# Altium PCB final_version.PcbDoc
Units mil, origin at the board's own origin, x right, y up, seen from the top; angles counter-clockwise.
Board outline 3740 x 3175 mil, 2 copper layers (Top Layer, Bottom Layer); 78 components, 60 nets, 259 pads, 35 vias.
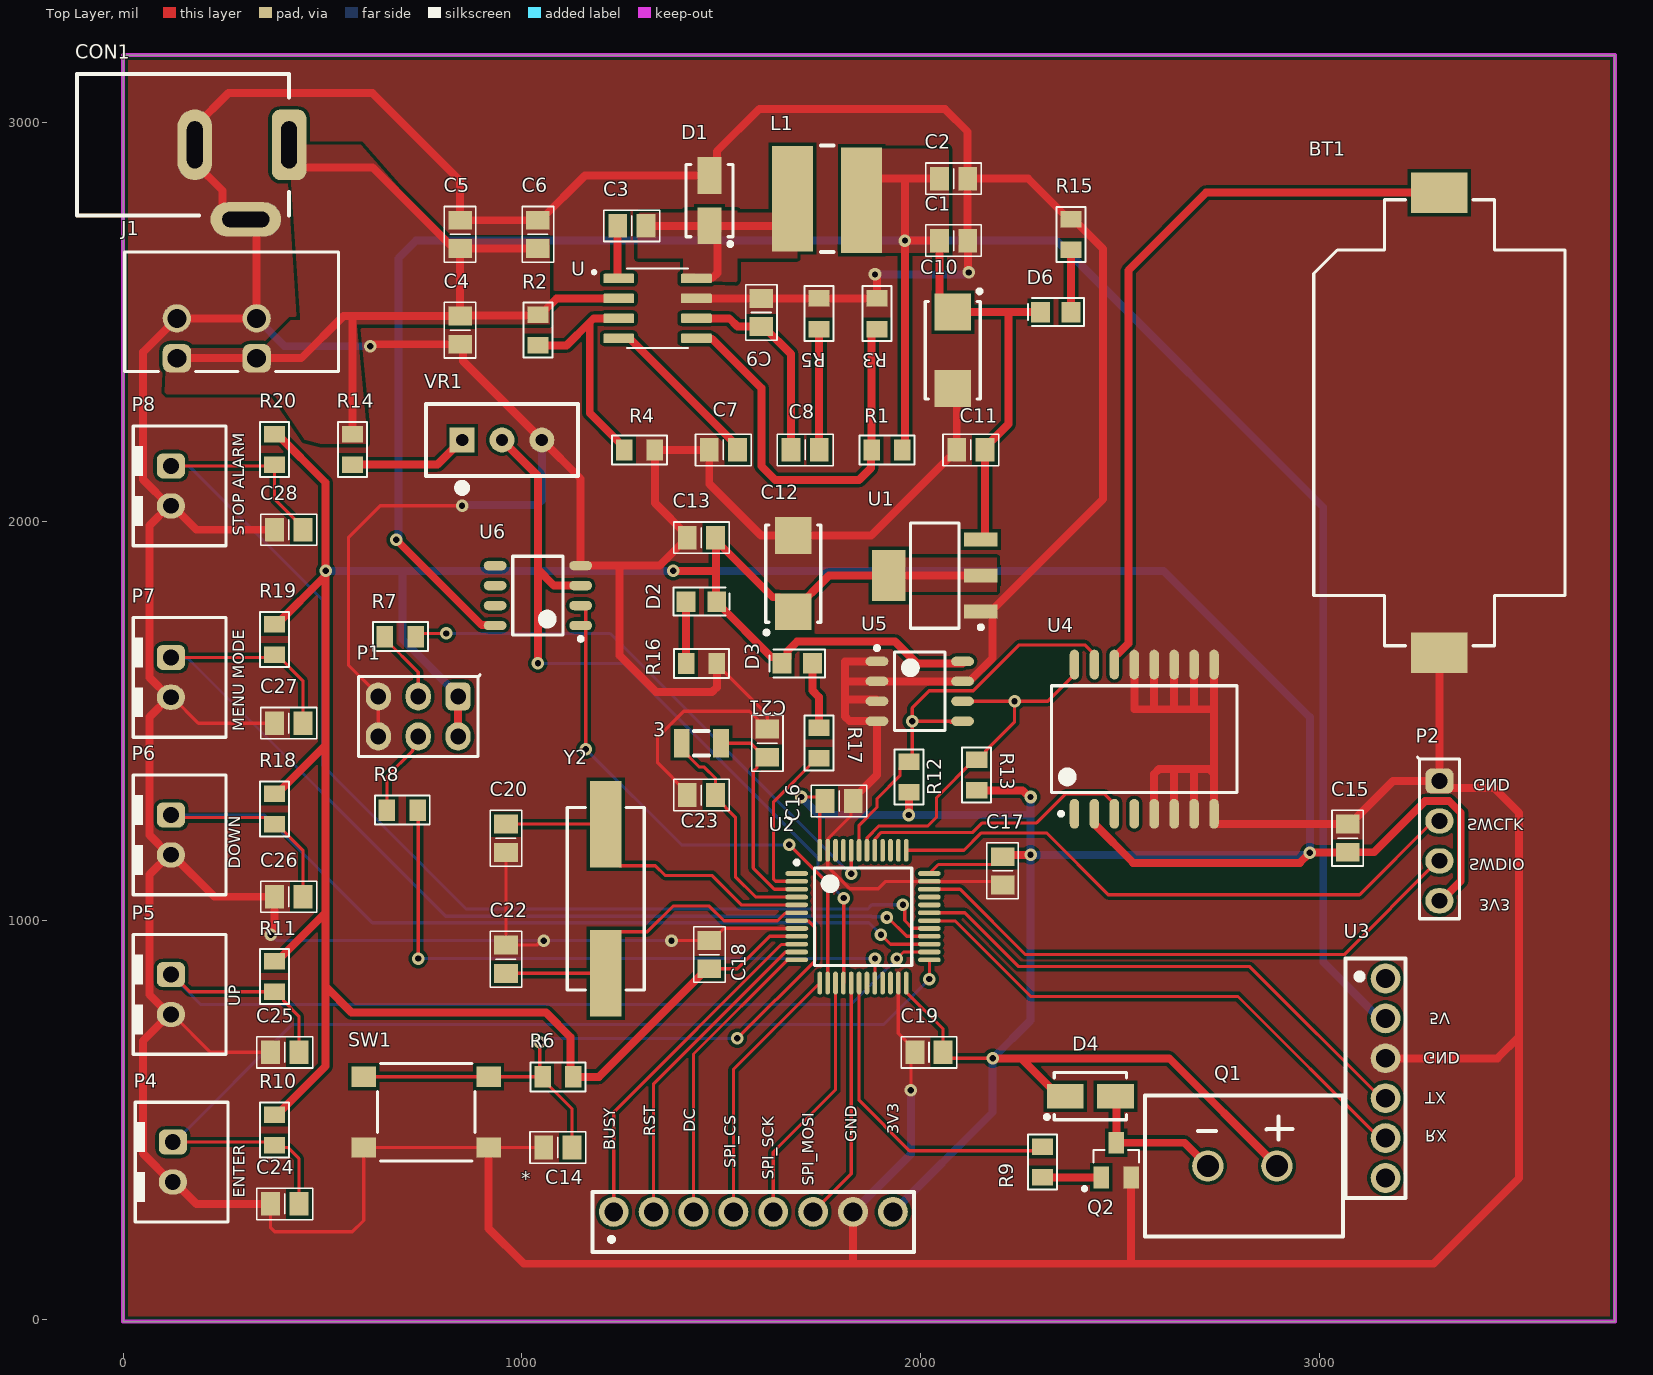
[diagram p0: Top Layer view]
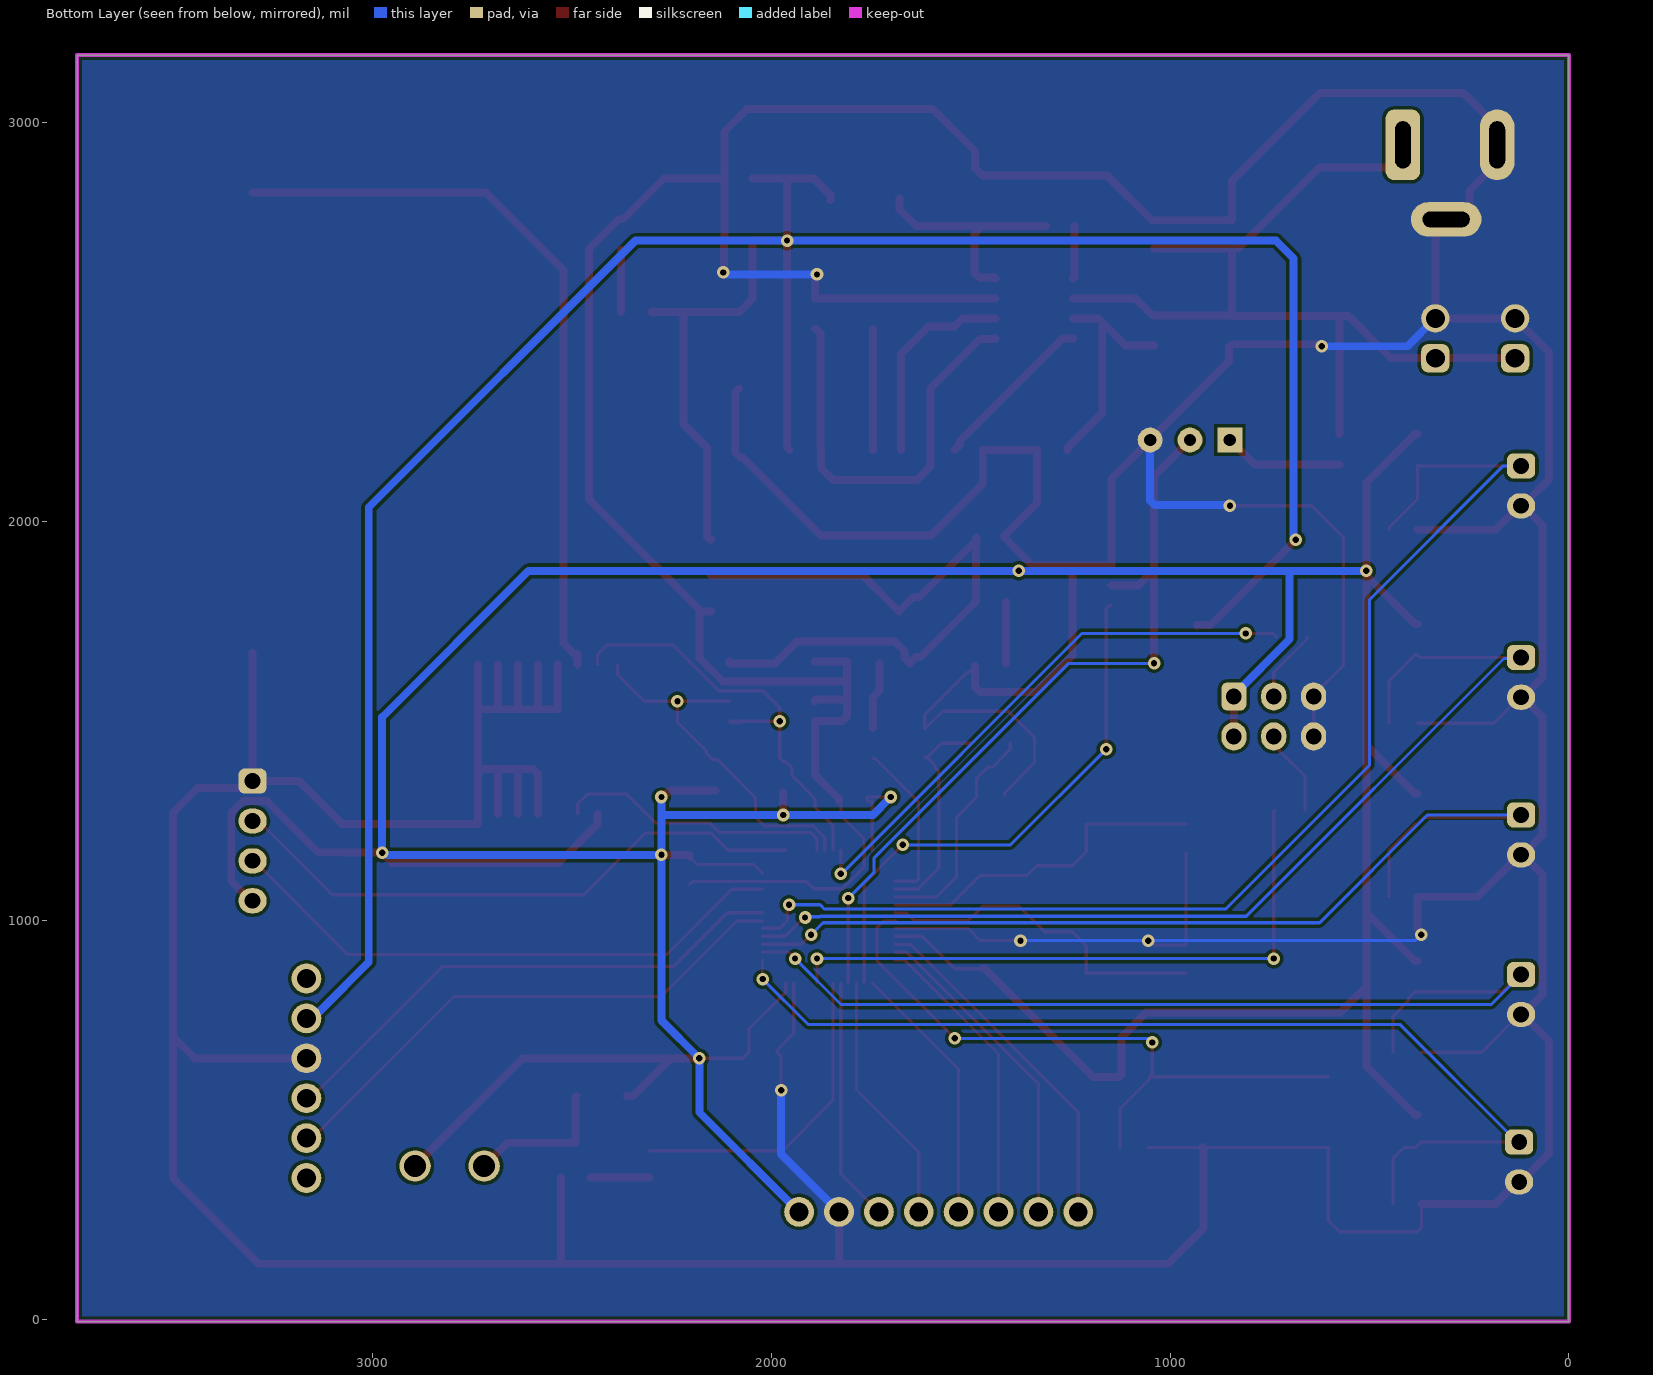
[diagram p1: Bottom Layer view, seen from below]

## Layer stack, top to bottom
Top Solder: solder mask 0.4, Solder Resist, Dk 3.5
Top Layer: signal copper 1.4
Dielectric 1: dielectric 12.6, FR-4, Dk 4.8
Bottom Layer: signal copper 1.4
Bottom Solder: solder mask 0.4, Solder Resist, Dk 3.5

## Board outline
0,-5 0,3170 3740,3170 3740,-5

## Design rules (kind name [scope] priority, off if disabled: settings)
Clearance [All] p1: gap=8 ignorepadtopadclearanceinfootprint=FALSE
PolygonConnect [All] p1: connectstyle=Direct reliefconductorwidth=10 reliefentries=4 polygonreliefangle="90 Angle" airgapwidth=10
RoutingVias [All] p1: holewidth=15.75 width=31.5 viastyle="Through Hole" minholewidth=15.75 minwidth=31.5 maxholewidth=15.75 maxwidth=31.5
SolderMaskExpansion [All] p1: expansion=4 istentingtop=FALSE
Width [All] p1: maxlimit=50 minlimit=8 preferedwidth=50
30 further rules are at their usual default settings.

## Classes and differential pairs
component class 08_ADC_measure: R14 U6 VR1
component class 07_E_ink_display_Button_control: * C24 C25 C26 C27 C28 D4 P4 P5 P6 P7 P8 Q1 Q2 R9 R10 R11 R18 R19 R20
component class 06_I2C_DS3231: BT1 R12 R13 U4 U5
component class 05_Uart_Bluetooth: U3
component class 04_MCU: 3 C14 C15 C16 C17 C18 C19 C20 C21 C22 C23 D2 D3 P1 P2 R6 R7 R8 R16 R17 SW1 U2 Y2
component class 03_Power_Spply: C1 C2 C3 C4 C5 C6 C7 C8 C9 C10 C11 C12 C13 CON1 D1 D6 J1 L1 R1 R2 R3 R4 R5 R15 U U1

## Components (designator, comment, footprint, x,y, rotation, side; value= is the part's Value field where it differs from the comment)
3 "32.768kHz" XKXGI-SUA-32.768K 1450,1445 r0 top
* "LCD_E_INK" LCD_E_INK_DISPLAY 1580,270 r0 top
BT1 "79527141" 79527141 3300,2248.23 r90 top
C1 "47uF" "C 0805" 2081.97,2705 r180 top
C2 "47uF" "C 0805" 2081.97,2860 r180 top
C3 "0.1uF" "C 0805" 1275.43,2742.01 r180 top
C4 "10uf" "C 0805" 845,2480.43 r90 top
C5 "10uf" "C 0805" 845,2720.43 r270 top
C6 "0.01uF" "C 0805" 1040,2720.43 r270 top
C7 "0.01uF" "C 0805" 1505,2180 r0 top
C8 "1000pF" "C 0805" 1710,2180 r180 top
C9 "47pF" "C 0805" 1600,2524.57 r270 top
C10 "22uF" "C SMD TAN 2312 (C)" 2080,2430 r270 top
C11 "100nF" "C 0805" 2125.43,2180 r0 top
C12 "22uF" "C SMD TAN 2312 (C)" 1680,1870 r90 top
C13 "100nF" "C 0805" 1450,1960 r0 top
C14 "105" "C 0805" 1090,431.42 r180 top
C15 "104" "C 0805" 3070,1207 r90 top
C16 "104" "C 0805" 1795,1300 r180 top
C17 "104" "C 0805" 2205,1125 r90 top
C18 "104" "C 0805" 1470,915 r270 top
C19 "104" "C 0805" 2020.43,670 r0 top
C20 "20p" "C 0805" 960,1206.57 r270 top
C21 "20p" "C 0805" 1615,1445 r90 top
C22 "20p" "C 0805" 960,903.43 r90 top
C23 "20p" "C 0805" 1450,1315 r180 top
C24 "105" "C 0805" 405.43,290 r180 top
C25 "105" "C 0805" 405.43,670 r180 top
C26 "105" "C 0805" 415.43,1060 r180 top
C27 "105" "C 0805" 415.43,1495 r180 top
C28 "105" "C 0805" 415.43,1980 r180 top
CON1 "CON DC PWR" CONN/DC/PWR/5.0MM 416.22,2945 r0 top
D1 "SS54F" "DO-214AC (SMA)" 1470,2805 r270 top
D2 "Led" "Led 0805" 1450,1800 r180 top
D3 "Led" "Led 0805" 1690,1645 r0 top
D4 "SS54F" "DO-214AC (SMA)" 2425,560 r180 top
D6 "Led" "Led 0805" 2338.39,2525.47 r0 top
J1 "6A, 150V" 691402910002B 272,2526.54 r90 top
L1 "10uh" "Inductor SMD CDRH3D67" 1765,2810 r0 top
P1 "Header 3X2" HDR/Header/6/DL 740,1511.93 r180 top
P2 "Header 4" HDR/Header/4 3300,1200 r270 top
P4 "Header 2" HDR/Header/2/BOX/RED 125,395 r0 top
P5 "Header 2" HDR/Header/2/BOX/RED 120,815 r0 top
P6 "Header 2" HDR/Header/2/BOX/RED 120,1215 r0 top
P7 "Header 2" HDR/Header/2/BOX/RED 120,1610 r0 top
P8 "Header 2" HDR/Header/2/BOX/RED 120,2090 r0 top
Q1 "Buzzer" "9056-TS Buzzer" 2810,385 r180 top
Q2 "MMBT2222A" MMBT-SOT23 2490,400 r0 top
R1 "8.2k" "R 0805" 1915,2180 r0 top
R2 "100k" "R 0805" 1040,2480.43 r90 top
R3 "1.6k" "R 0805" 1890,2521.61 r270 top
R4 "20k" "R 0805" 1295,2180 r180 top
R5 "30k" "R 0805" 1745,2521.61 r270 top
R6 "10k" "R 0805" 1090,608.58 r180 top
R7 "100k" "R 0805" 695,1711.93 r0 top
R8 "100k" "R 0805" 700,1276.93 r180 top
R9 "1k" "R 0805" 2305,395 r270 top
R10 "10k" "R 0805" 380,475 r270 top
R11 "10k" "R 0805" 380,860 r270 top
R12 "10k" "R 0805" 1970,1360 r90 top
R13 "4.7k" "R 0805" 2140,1365 r90 top
R14 "100k" "R 0805" 575,2181.61 r90 top
R15 "1.6k" "R 0805" 2376.77,2720 r270 top
R16 "470" "R 0805" 1450,1645 r180 top
R17 "470" "R 0805" 1745,1445 r90 top
R18 "10k" "R 0805" 380,1280 r270 top
R19 "10k" "R 0805" 380,1705 r270 top
R20 "10k" "R 0805" 380,2181.61 r270 top
SW1 "430152043826" WS-TASV_L6W6H4.3_4301x20438x6 760,520 r180 top
U "TPS54231D" SOIC127P599X175-8N 1340,2535 r0 top
U1 "AMS1117-3.3V, 1A" "AMS1117-3.3V SOT223" 2035,1865 r180 top
U2 "STM32F103C8T6" STM32F103C8T6 1855,1010 r0 top
U3 "HC05" PCBComponent_1 3165,605 r270 top
U4 "DS3231SN" DS3231SN-16SOIC 2560,1455 r90 top
U5 "AT24C512C-SSHD-T" M24M01-RMN6TP 1997.28,1575 r0 top
U6 "LM358DR" LM358DR 1040,1815 r180 top
VR1 "VR" "R VAR E" 850,2205 r0 top
Y2 "8MHz" WE-XTAL_HC49/4HSMX 1210,1055 r90 top

## Footprints (in the part's own frame and the unit in brackets; to place one, negate y for a bottom-side part, rotate by r counter-clockwise, add the part's x,y. Pads: shape width x height; smd on the part's side, far side on the other; paste and mask are expansions set on the pad)
"9056-TS Buzzer" [mm]
  round 2 hole 1.4 mask+0.102: 1(-2.1,0) 2(2.3,0)
  silkscreen extent -6.3,-4.5 6.3,4.5, body extent -4.35,-4.3 4.65,4.7, height 6.5
79527141 [mm] "Battery Holder"
  rect 2.6x3.6 smd: 1(14.65,0) 2(-14.65,0)
  silkscreen extent -14.2,-8 14.2,8, body extent -15.95,-8 15.95,8, height 5.66
691402910002B [mm] "2.54 mm - Screwless Horizontal Entry - 02p"
  rrect50% 1.8x1.8 hole 1.2: 1(-2.96,3.48) 1(-2.96,-1.6)
  round 1.8 hole 1.2: 2(-0.42,3.48) 2(-0.42,-1.6)
  silkscreen extent -3.81,-6.8 3.81,6.8, body extent -3.81,-6.8 3.81,6.8, height 12.64
"AMS1117-3.3V SOT223" [mm] "SOT223, 4-Leads, Body 6.51x7.00mm, Pitch 2.29mm"
  rect 2.15x0.9 smd: 1(-2.93,2.29) 2(-2.93,0) 3(-2.93,-2.29)
  rect 2.15x3.25 smd: 4(2.93,0)
  silkscreen extent -3.06,-3.35 1.55,3.41, body extent -3.5,-3.35 3.5,3.35, height 1.8
"C 0805" [mm] "Chip Capacitor, 2-Leads, Body 2.0x1.3mm, IPC Medium Density"
  rect 1.2x1.5 smd: 1(-0.9,0) 2(0.9,0)
  silkscreen extent -1.78,-1 1.78,1, body extent -1,-0.64 1,0.61, height 0.6
"C SMD TAN 2312 (C)" [mm] "Molded Capacitor, 2-Leads, Body 6.0x3.2mm, IPC Medium Density"
  rect 2.35x2.3 smd: 1(-2.425,0) 2(2.425,0)
  silkscreen extent -3.87,-1.75 3.1,1.83, body extent -3.09,-1.58 3.09,1.63, height 2.68
CONN/DC/PWR/5.0MM [mm]
  rrect50% 2.2x4.5 hole 1 slot 3 at 90 deg: 1(0,0)
  oval 2.2x4.5 hole 1 slot 3 at 90 deg: 2(-6,0)
  oval 4.5x2.2 hole 1 slot 3 at 0 deg: 3(-2.75,-4.75)
  silkscreen extent -13.5,-4.5 0,4.5, body extent -13.58,-5 0.25,4.5, height 11.02
"DO-214AC (SMA)" [mm] "Molded Diode, 2-Leads, Body 4.3x2.7mm, IPC Medium Density"
  rect 2.35x1.55 smd: 1(-1.6,0) 2(1.6,0)
  silkscreen extent -2.3,-1.5 2.89,1.5, body extent -2.6,-1.3 2.6,1.3, height 2.4
DS3231SN-16SOIC [mm] "SOIC, 16-Leads, Body 11.55x7.50mm, Pitch 1.27mm, IPC Medium Density"
  oval 1.9x0.6 smd: 1(-4.75,4.445) 2(-4.75,3.175) 3(-4.75,1.905) 4(-4.75,0.635) 5(-4.75,-0.635) 6(-4.75,-1.905) 7(-4.75,-3.175) 8(-4.75,-4.445) 9(4.75,-4.445) 10(4.75,-3.175) 11(4.75,-1.905) 12(4.75,-0.635) 13(4.75,0.635) 14(4.75,1.905) 15(4.75,3.175) 16(4.75,4.445)
  silkscreen extent -4.87,-5.9 3.4,5.9, body extent -5.16,-5.9 5.16,5.9, height 2.65
HDR/Header/2/BOX/RED [mm]
  rrect50% 1.8x1.6 hole 1: 1(0,1.27)
  oval 1.8x1.6 hole 1: 2(0,-1.27)
  silkscreen extent -2.41,-3.81 3.5,3.81, body extent -2.35,-3.7 3.4,3.7, height 7
HDR/Header/4 [mm]
  rrect50% 1.6x1.8 hole 1: 1(-3.81,0)
  oval 1.6x1.8 hole 1: 2(-1.27,0) 3(1.27,0) 4(3.81,0)
  silkscreen extent -5.33,-1.4 4.95,1.27, body extent -5.08,-1.27 5.08,1.27, height 8.89
HDR/Header/6/DL [mm]
  rrect50% 1.6x1.8 hole 1: 1(-2.54,-1.27)
  oval 1.6x1.8 hole 1: 2(-2.54,1.27) 3(0,-1.27) 4(0,1.27) 5(2.54,-1.27) 6(2.54,1.27)
  silkscreen extent -3.94,-2.67 3.81,2.54, body extent -3.81,-2.54 3.81,2.54, height 8.89
"Inductor SMD CDRH3D67" [mm] "Precision Wire Wound Inductor, 2-Leads, Body 10.0x8.0mm, IPC Low Density"
  rect 2.6x6.7 smd: 1(-2.2,0) 2(2.2,-0.1)
  silkscreen extent -0.4,-3.4 0.4,3.4, body extent -3.35,-3.35 3.35,3.35, height 2.9
LCD_E_INK_DISPLAY [mm] "LCD_E_INK_DISPLAY"
  round 1.9 hole 1.2 mask+0.102: 1(-8.89,0) 2(-6.35,0) 3(-3.81,0) 4(-1.27,0) 5(1.27,0) 6(3.81,0) 7(6.35,0) 8(8.89,0)
  silkscreen extent -10.24,-2.56 10.24,1.28, body extent -14.79,-0.53 17.03,0.89, height 38.16
"Led 0805" [mm] "Led SMD 0805"
  rect 1.2x1.3 smd: 1(-0.975,0) 2(0.975,0)
  silkscreen extent -1.78,-0.89 1.78,0.89, body extent -1.01,-0.64 1.01,0.61, height 1.1
LM358DR [mm] "SOIC, 8-Leads, Body 4.90x3.90mm, Pitch 1.27mm, IPC Medium Density"
  oval 1.45x0.6 smd: 1(-2.725,1.905) 2(-2.725,0.635) 3(-2.725,-0.635) 4(-2.725,-1.905) 5(2.725,-1.905) 6(2.725,-0.635) 7(2.725,0.635) 8(2.725,1.905)
  silkscreen extent -2.85,-2.5 1.6,2.88, body extent -3,-2.5 3,2.5, height 1.75
M24M01-RMN6TP [mm] "SOIC, 8-Leads, Body 4.90x3.90mm, Pitch 1.27mm, IPC Medium Density"
  oval 1.45x0.6 smd: 1(-2.725,1.905) 2(-2.725,0.635) 3(-2.725,-0.635) 4(-2.725,-1.905) 5(2.725,-1.905) 6(2.725,-0.635) 7(2.725,0.635) 8(2.725,1.905)
  silkscreen extent -2.85,-2.5 1.6,2.88, body extent -3,-2.5 3,2.5, height 1.25
MMBT-SOT23 [mm]
  rect 1x1.4 smd: 1(-0.95,-1.1) 2(0,1.1) 3(0.95,-1.1)
  silkscreen extent -2.13,-1.92 1.45,0.65, body extent -1.45,-1.3 1.45,1.2, height 1.1
PCBComponent_1 [mm] "HC05_Blueetooth"
  round 1.9 hole 1.2 mask+0.102: 1(-6.35,0) 2(-3.81,0) 3(-1.27,0) 4(1.27,0) 5(3.81,0) 6(6.35,0)
  silkscreen extent -7.62,-2.54 7.62,1.27, body extent -8.08,-0.49 8.02,5.51, height 38.75
"R 0805" [mm] "Chip Resistor, 2-Leads, Body 2.0x1.3mm, IPC Medium Density"
  rect 1.05x1.35 smd: 1(-0.975,0) 2(0.975,0)
  silkscreen extent -1.75,-0.92 1.75,0.92, body extent -1,-0.61 1,0.59, height 0.5
"R VAR E" [mil]
  rect 62x62 hole 31: 1(0,0)
  round 62 hole 31: 2(100,0) 3(200,0)
  silkscreen extent -90,-130 290,90, body extent -93,-97 293,97, height 459
SOIC127P599X175-8N [mm]
  rrect25% 1.97x0.6 smd: 1(-2.47,1.905) 2(-2.47,0.635) 3(-2.47,-0.635) 4(-2.47,-1.905) 5(2.47,-1.905) 6(2.47,-0.635) 7(2.47,0.635) 8(2.47,1.905)
  silkscreen extent -4.14,-2.52 1.95,2.52
STM32F103C8T6 [mm] "TSQFP, 48-Leads, Body 7.00x7.00mm, Pitch 0.50mm, IPC Medium Density"
  oval 1.45x0.3 smd: 1(-4.225,2.75) 2(-4.225,2.25) 3(-4.225,1.75) 4(-4.225,1.25) 5(-4.225,0.75) 6(-4.225,0.25) 7(-4.225,-0.25) 8(-4.225,-0.75) 9(-4.225,-1.25) 10(-4.225,-1.75) 11(-4.225,-2.25) 12(-4.225,-2.75) 25(4.225,-2.75) 26(4.225,-2.25) 27(4.225,-1.75) 28(4.225,-1.25) 29(4.225,-0.75) 30(4.225,-0.25) 31(4.225,0.25) 32(4.225,0.75) 33(4.225,1.25) 34(4.225,1.75) 35(4.225,2.25) 36(4.225,2.75)
  oval 0.3x1.45 smd: 13(-2.75,-4.225) 14(-2.25,-4.225) 15(-1.75,-4.225) 16(-1.25,-4.225) 17(-0.75,-4.225) 18(-0.25,-4.225) 19(0.25,-4.225) 20(0.75,-4.225) 21(1.25,-4.225) 22(1.75,-4.225) 23(2.25,-4.225) 24(2.75,-4.225) 37(2.75,4.225) 38(2.25,4.225) 39(1.75,4.225) 40(1.25,4.225) 41(0.75,4.225) 42(0.25,4.225) 43(-0.25,4.225) 44(-0.75,4.225) 45(-1.25,4.225) 46(-1.75,4.225) 47(-2.25,4.225) 48(-2.75,4.225)
  silkscreen extent -4.35,-3.1 3.1,3.57, body extent -4.5,-4.5 4.5,4.5, height 1.6
WE-XTAL_HC49/4HSMX [mm] "Quartz Crystal, size HC49/4HSMX, body 11.4x4.9mm"
  rect 5.5x2 smd: 1(-4.75,0) 2(4.75,0)
  silkscreen extent -5.8,-2.45 5.8,2.45, body extent -6.7,-2.45 6.7,2.45, height 4.3
WS-TASV_L6W6H4.3_4301x20438x6 [mm] "SMD Tact Switch, body 6x6mm"
  rect 1.55x1.3 smd: A1(-3.975,2.25) A2(3.975,2.25) B1(-3.975,-2.25) B2(3.975,-2.25)
  silkscreen extent -3.1,-3.1 3.1,3.1, body extent -4.5,-3.1 4.5,3.1, height 4.3
XKXGI-SUA-32.768K [mm]
  rect 1x1.8 smd: 1(-1.25,0) 2(1.25,0)
  silkscreen extent -0.48,-0.79 0.47,0.79, body extent -1.6,-0.75 1.6,0.75, height 0.9

## Part data
3: library part XKXGI-SUA-32.768K, "32.768kHz Surface Mount Crystal 12.5pF ±20ppm ±30ppm SMD3215-2P Crystals ROHS", Frequency Stability=+/-30ppm, Frequency Tolerance=+/-20ppm, LCSC Part #=C5213671, Load Capacitance=12.5pF, Manufacturer="YXC Crystal Oscillators", Operating Temperature Max="+ 85 C", Operating Temperature Min="- 40 C", Package / Case=SMD3215-2P, Supplier 1 Part Number=N/A, ComponentLink1Description=Datasheet, ComponentLink1URL=https://www.lcsc.com/datasheet/lcsc_datasheet_2210261730_YXC-Crystal-Oscillators-XKXGI-SUA-32-768K_C5213671.pdf, Frequency=32.768kHz, Manufacturer Part Number=XKXGI-SUA-32.768K, Mount=SMD/SMT, Packaging="Tape and Reel", Supplier 1=Mouser, Supplier 1 URL=N/A, Supplier 2=Digi-Key, Supplier 2 Part Number=N/A, Supplier 2 URL=N/A, Supplier 3=thegioiic, Supplier 3 Part Number=N/A, Supplier 3 URL=N/A
*: library part P?
BT1: "WA-BCPH Battery Holder, SMT, battery type 2032", Manufacturer="Wurth Elektronik", Operating Temperature Max=105°C, Operating Temperature Min=-40°C, Battery Type=2032, Category="Battery Holders", ComponentLink1Description="Website Link", ComponentLink1URL=https://www.we-online.com/redexpert/article/79527141?ad, ComponentLink2Description="Datasheet Link", ComponentLink2URL=https://www.we-online.com/redexpert/spec/79527141?ad, Manufacturer Part Number=79527141, Match Code=WA-BCPH, Mount="Surface Mount", Packaging="Tape and Reel"
C1 C2 C3 C4 C5 C6 C7 C8 C9 C11 C13 C14 C15 C16 C17 C18 C19 C20 C21 C22 C23 C24 C25 C26 C27 C28: library part "Capacitor NP", "Capacitor non-pol"
C10 C12: library part Capacitor, "Capacitor pol"
CON1: "DC input connector"
D1 D4: library part "Diode Schottky", "Schottky Diode"
D2 D3 D6: "Typical LED"
J1: library part 691402910002B, "WR-TBL Series 4029 Horizontal Entry, THT, pitch 2.54mm, 2p", LCSC Part #=N/A, Manufacturer="Wurth Elektronik", Operating Temperature Max=105°C, Operating Temperature Min=-40°C, Rated Current=6A, Working Voltage=150V, Application=Screwless, Category="Terminal Blocks", ComponentLink1Description=Datasheet, ComponentLink1URL=https://www.we-online.com/redexpert/spec/691402910002B?ad, Manufacturer Part Number=691402910002B, Match Code=WR-TBL, Modularity=No, Mount="Through Hole", Number of Pins=2, Number of Rows=1, Orientation=Horizontal, Packaging=Box, Pitch=2.54mm, Supplier 1=Mouser, Supplier 1 Part Number=N/A, Supplier 1 URL=N/A, Supplier 2=Digi-Key, Supplier 2 Part Number=N/A, Supplier 2 URL=N/A, Supplier 3=thegioiic, Supplier 3 Part Number=N/A, Supplier 3 URL=https://www.thegioiic.com/kf141-2-54-2-r-terminal-block-2-tiep-diem-cam-day-ngang-2-54mm-150v-2a
L1: library part Inductor, "Inductor"
P1: "Header, 3-Pin, Dual row"
P2: "Header, 4-Pin"
P4 P5 P6 P7 P8: "Header, 2-Pin"
Q1: library part "9056-TS Buzzer"
Q2: "TRANS NPN, 40V, 600MA, SOT23-3", Current - Collector=600mA, DC Current Gain=35-300, LCSC Part #=C94515, Manufacturer="Diotec Semiconductor", Operating Temperature Max="+ 150 C", Operating Temperature Min="- 55 C", Package / Case=SOT-23, Power Dissipation=250mW, Supplier 1 Part Number=637-MMBT2222A, Supplier 2 Part Number=2796-MMBT2222ATR-ND, Supplier 3 Part Number=N/A, Voltage - Collector Emitter Breakdown=40V, ComponentLink1Description=Datasheet, ComponentLink1URL=https://www.mouser.vn/datasheet/2/849/mmbt2222-3324676.pdf, Configuration=Single, Gain Bandwidth Product fT=250MHz, Manufacturer Part Number=MMBT2222A, Mount=SMD/SMT, Packaging="Tape and Reel", Supplier 1=Mouser, Supplier 1 URL=https://www.mouser.vn/ProductDetail/Diotec-Semiconductor/MMBT2222A?qs=OlC7AqGiEDl9N1c3%252BL%2F%252Brw%3D%3D, Supplier 2=Digi-Key, Supplier 2 URL=https://www.digikey.com/en/products/detail/diotec-semiconductor/MMBT2222A/13163394, Supplier 3=thegioiic, Supplier 3 URL=https://www.thegioiic.com/mmbt2222a-transistor-npn-40v-0-6a-3-chan-sot-23, Transistor Polarity=NPN
R1 R2 R3 R4 R5 R6 R7 R8 R9 R10 R11 R12 R13 R14 R15 R16 R17 R18 R19 R20: library part Resistor, "Resistor"
SW1: "WS-TASV SMT Tact Switch, L6 x W6 x H4.3mm, 260g, SPST-NO, 12V, 50mA", LCSC Part #=N/A, Manufacturer="Wurth Elektronik", Operating Temperature Max=85°C, Operating Temperature Min=-40°C, Package / Case=0805, Rated Current=50mA, Rated Voltage=12VDC, Supplier 1 Part Number=710-430152043826, Supplier 2 Part Number=732-6991-2-ND, Supplier 3 Part Number=OEM, Category="Tact Switches", Circuit=SPST-NO, ComponentLink1Description=Datasheet, ComponentLink1URL=https://www.we-online.com/redexpert/spec/430152043826?ad, Contact Material="Stainless Steel", Height=4.3mm, Length=6mm, Manufacturer Part Number=430152043826, Match Code=WS-TASV, Mount="Surface Mount", Operation Force=260g, Packaging="Tape and Reel", Supplier 1=Mouser, Supplier 1 URL=https://www.mouser.vn/ProductDetail/Wurth-Elektronik/430152043826?qs=wr8lucFkNMUjBcFj1giTsA%3D%3D, Supplier 2=Digi-Key, Supplier 2 URL=https://www.digikey.com/en/products/detail/w%C3%BCrth-elektronik/430152043826/5208994, Supplier 3=thegioiic, Supplier 3 URL=https://www.thegioiic.com/nut-nhan-6x6mm-cao-4-3mm-4-chan-smd, Terminal Material="Copper Alloy", Terminal Plating=Silver, Washable=No, Width=6mm
U: "å…·æœ‰Eco-modeï¼†tradeçš„3.5è‡³28Vè¾“å…¥ï¼Œ2Aï¼Œ570kHzé™åŽ‹è½¬æ¢å™¨ï¼›8-SOIC -40è‡³150", PACKAGE="SOIC-8 Texas Instruments", Availability=Unavailable, DigiKey-Purchase-URL=https://snapeda.com/shop?store=DigiKey&id=456068, MF="Texas Instruments", MP=TPS54231D, Price=None, SnapEDA_Link=https://www.snapeda.com/parts/TPS54231D/Texas%20Instruments/view-part/456068/?ref=snap, Texas_Instruments-Purchase-URL=https://snapeda.com/shop?store=Texas+Instruments&id=456068
U1: library part AMS1117-3.3V, "1A 60dB@(120Hz) Fixed 3.3V Positive electrode 12V SOT-223 Linear Voltage Regulators (LDO) ROHS", Current Input Maximum=N/A, Current Output Maximum=1A, LCSC Part #=C347222, Manufacturer=AMS, Operating Temperature Max="+ 85 C", Operating Temperature Min="- 40 C", Voltage Input Maximum=15V, Voltage Output=3.3V, ComponentLink1Description=Datasheet, ComponentLink1URL=http://www.advanced-monolithic.com/pdf/ds1117.pdf, Manufacturer Part Number=N/A, Mount=SMD/SMT, Packaging="Tape and Reel", Pad Count=4, Supplier 1=Mouser, Supplier 1 Part Number=N/A, Supplier 1 URL=N/A, Supplier 2=Digi-Key, Supplier 2 Part Number=N/A, Supplier 2 URL=N/A, Supplier 3=thegioiic, Supplier 3 Part Number=N/A, Supplier 3 URL=https://www.thegioiic.com/ams1117-3-3v-ic-on-ap-3-3v-1a-sot-223
U2: "ARM Microcontrollers - MCU 32BIT Cortex M3 64KB 20KB RAM 2X12 ADC", LCSC Part #=C8734, Manufacturer=STMicroelectronics, Manufacturer Part Number=STM32F103C8T6TR, Operating Temperature Max="+ 85 C", Operating Temperature Min="- 40 C", Package / Case=LQFP48, Supplier 1 Part Number=511-STM32F103C8T6, Supplier 2 Part Number=497-17666-2-ND, Supply Voltage - Max="3.6 V", Supply Voltage - Min="2 V", ComponentLink1Description=Datasheet, ComponentLink1URL=https://www.mouser.com/datasheet/2/389/stm32f103c8-1851025.pdf, Mount=SMD/SMT, Packaging="Tape and Reel", Pad Count=48, Part Number=STM32F103C8T6, Supplier 1=Mouser, Supplier 1 URL=https://www.mouser.com/ProductDetail/STMicroelectronics/STM32F103C8T6?qs=bhCVus9SdFtq6kqxsU5%2FDA%3D%3D, Supplier 2=Digi-Key, Supplier 2 URL=https://www.digikey.com/en/products/detail/stmicroelectronics/stm32f103c8t6tr/2122442, Supplier 3=thegioiic, Supplier 3 Part Number=STM32F103C8T6, Supplier 3 URL=https://www.thegioiic.com/stm32f103c8t6-32-bit-arm-cortex-m3-microcontroller-72mhz-64kb-flash-48-lqfp
U3: library part Component_1
U4: library part DS3231SN-16SOIC, "IC RTC CLK/CALENDAR I2C 16SOIC", LCSC Part #=N/A, Manufacturer="Analog Devices Inc./Maxim Integrated", Operating Supply Current="110 - 170 (µA)", Operating Temperature Max="+ 85 C", Operating Temperature Min="- 40 C", Package / Case=SOIC-16, Supplier 1 Part Number=700-DS3231SN-, Supplier 2 Part Number=DS3231SN#-ND, Supply Voltage - Max="5.5 V", Supply Voltage - Min="2.3 V", ComponentLink1Description=Datasheet, ComponentLink1URL=https://www.analog.com/media/en/technical-documentation/data-sheets/DS3231.pdf, Manufacturer Part Number=DS3231SN, Mount=SMD/SMT, Packaging="Tape and Reel", RTC Bus Interface="I2C, Serial", RTC Memory Size=N/A, Supplier 1=Mouser, Supplier 1 URL=https://www.mouser.com/ProductDetail/Analog-Devices-Maxim-Integrated/DS3231SN?qs=ffX8NcjNb2RmKAb9wAk9Ug%3D%3D, Supplier 2=Digi-Key, Supplier 2 URL=https://www.digikey.com/en/products/detail/analog-devices-inc-maxim-integrated/DS3231SN/1197576, Supplier 3=thegioiic, Supplier 3 Part Number=N/A, Supplier 3 URL=https://www.thegioiic.com/ds3231sn-ic-rtc-clock-calendar-16-soic, Time Format="HH:MM:SS (12 hr, 24 hr)"
U5: "EEPROM SERIAL EEPROM 512K (64K X 8) 2WIRE 2.5V", LCSC Part #=C12371, Manufacturer=Microchip, Maximum Clock Frequency="1 MHz", Operating Temperature Max="+ 85 C", Operating Temperature Min="- 40 C", Package / Case=SOIC-8, Supplier 1 Part Number=556-AT24C512C-SSHD-T, Supplier 2 Part Number=AT24C512C-SSHD-TTR-ND, Supply Voltage - Max="5.5 V", Supply Voltage - Min="2.5 V", ComponentLink1Description=Datasheet, ComponentLink1URL=https://www.mouser.vn/datasheet/2/268/AT24C512C_I_c2_b2C_Compatible__Two_Wire__Serial_EE-2306430.pdf, Interface Type="2-Wire, I2C", Manufacturer Part Number=AT24C512C-SSHD-T, Memory Size="512 kbit", Mount=SMD/SMT, Packaging="Tape and Reel", Supplier 1=Mouser, Supplier 1 URL=https://www.mouser.vn/ProductDetail/Microchip-Technology/AT24C512C-SSHD-T?qs=Oaf4mloV4cM7Q6xetGfOtg%3D%3D, Supplier 2=Digi-Key, Supplier 2 URL=https://www.digikey.com/en/products/detail/microchip-technology/at24c512c-sshd-t/3046245, Supplier 3=thegioiic, Supplier 3 Part Number=AT24C512C-SSHD-T, Supplier 3 URL=https://www.thegioiic.com/at24c512c-sshd-t-ic-eeprom-512kbit-8-soic
U6: "Operational Amplifiers - Op Amps Dual Op Amp", Active Read Current - Max=Active, Dual Supply Voltage="+/- 3 V, +/- 5 V, +/- 9 V", Ib - Input Bias Current="250 nA", LCSC Part #=C5423, Manufacturer="Texas Instruments", Operating Supply Current="350 uA", Operating Temperature Max="+ 85 C", Operating Temperature Min="- 40 C", Output Current per Channel="20 mA", Package / Case=SOIC-8, Supplier 1 Part Number=595-LM358DR, Supplier 2 Part Number=N/A, Supply Voltage - Max="32 V", Supply Voltage - Min="3 V", Voltage Gain dB="100 dB", Vos - Input Offset Voltage="7 mV", CMRR - Common Mode Rejection Ratio="80 dB", ComponentLink1Description=Datasheet, ComponentLink1URL=https://www.ti.com/general/docs/suppproductinfo.tsp?distId=26&gotoUrl=https://www.ti.com/lit/gpn/lm358, GBP - Gain Bandwidth Product="700 kHz", Manufacturer Part Number=LM358DR, Mount=SMD/SMT, Number of Channels="2 Channel", Packaging="Tape and Reel", SR - Slew Rate="300 mV/us", Supplier 1=Mouser, Supplier 1 URL=https://www.mouser.com/ProductDetail/Texas-Instruments/LM358DR?qs=Zu35EjizYSSY6pJ37yjmHA%3D%3D, Supplier 2=Digi-Key, Supplier 2 URL=N/A, Supplier 3=thegioiic, Supplier 3 Part Number=N/A, Supplier 3 URL=N/A
VR1: library part "Resistor Variable", "Resistor Variable"
Y2: library part 071105086016, "WE-XTAL Quartz Crystal, SMT, HC49/4HSMX, 8MHz, +/-30ppm", Frequency Stability=+/-50ppm, Frequency Tolerance=+/-30ppm, Load Capacitance=16pF, Manufacturer="Wurth Elektronik", Manufacturer Part Number=830003151, Operating Temperature Max="+ 60 C", Operating Temperature Min="- 10 C", Package / Case=HC49/4HSMX, Supplier 1 Part Number=710-830003151, Supplier 2 Part Number=732-830003151TR-ND, Supplier 3 Part Number=N/A, ComponentLink1Description=Datasheet, ComponentLink1URL=https://katalog.we-online.com/pbs/datasheet/830003151.pdf, Frequency=8MHz, Mount=SMD/SMT, Packaging="Tape and Reel", Supplier 1=Mouser, Supplier 1 URL=https://www.mouser.com/ProductDetail/Wurth-Elektronik/830003151?qs=2WXlatMagcHisY7XHApyYg%3D%3D, Supplier 2=Digi-Key, Supplier 2 URL=https://www.digikey.com/en/products/detail/w%C3%BCrth-elektronik/830003151/13979296, Supplier 3=thegioiic, Supplier 3 URL=https://www.thegioiic.com/thach-anh-8mhz-2-chan-smd-hc49-s

## Via types
v1: diameter 31.5, hole 15.75, Top Layer to Bottom Layer, tented both sides, 32 vias
v2: diameter 31.5, hole 15.75, Top Layer to Bottom Layer, 3 vias

## Nets (pads, with @x,y where several pads share a name; then routed paths per layer and width w, separated by ;. In a path a pad name is that pad's centre, name@x,y a point inside that pad or via, vN(x,y) a via of type N, cw(c..) or ccw(c..) an arc to the next point about the centre after c; other vN are vias at no path point)
5V: C1.2 C2.2 C10.1 C11.2 D6.1 L1.2 R1.2 U1.3 U3.2 U6.8 | length 6999.2
  Top Layer w20: v1(685,1955) 899.31,1740.69 932.02,1740.69 U6.8 ; L1.2 1851.61,2818.82 1892.8,2860 1960,2860 ; R1.2 1960,2186.61 v1(1960,2705) ; C2.2 1960,2860 ; U1.3 2153.15,1955.16 2160.87,1962.87 C11.2 2160.87,2185.91 2220,2245.04 2220,2525.47 ; D6.1 2220,2525.47 ; v1(1960,2705) 1960,2860 ; v1(1960,2705) C1.2 2046.54,2558.94 C10.1 2220,2525.47
  Bottom Layer w20: v1(685,1955) 690,1960 690,2660 735,2705 v1(1960,2705) 2340,2705 3008.75,2036.25 3008.75,896.25 3129.84,775.16 3130.01,775.16 3145,760.17 U3.2@3145,760
BOOT0: R7.2 U2.44 | length 1403.9
  Top Layer w8: R7.2 741.46,1720 v1(810,1720) ; v1(1825.47,1117.43) U2.44
  Bottom Layer w8: v1(810,1720) 1220.94,1720 1823.52,1117.43 v1(1825.47,1117.43)
BOOT1: R8.1 U2.20 | length 1579.3
  Top Layer w8: R8.1 740,1275.32 v1(740,905) ; U2.20 1885,844.13 1884.76,844.37 1884.76,904.76 v1(1885,905)
  Bottom Layer w8: v1(740,905) v1(1885,905)
GND: *.7 BT1.2 C1.1 C2.1 C4.1 C5.1 C6.1 C7.1 C9.1 C10.2 C11.1 C12.2 C13.1 C14.2 C15.2 C16.1 C17.1 C18.1 C19.1 C20.2 C21.2 C22.2 C23.2 C24.2 C25.2 C26.2 C27.2 C28.2 CON1.2 CON1.3 D1.1 J1.2 P1.5 P1.6 P2.1 P4.2 P5.2 P6.2 P7.2 P8.2 Q2.3 R3.1 R4.1 R5.1 R15.1 R16.1 SW1.A1 SW1.A2 U1.1 U2.8 U2.23 U2.35 U2.47 U3.3 U4.5 U4.6 U4.7 U4.8 U4.9 U4.10 U4.11 U4.12 U4.13 U5.1 U5.2 U5.3 U5.4 U5.7 U6.4 U.7 VR1.3 | length 27293.5
  Top Layer w8: P5.2 123.94,765 218.94,670 C25.2 ; P7.2 123.94,1560 188.94,1495 C27.2 ; C24.2 370,230 380,220 575,220 603.5,248.5 SW1.A2 SW1.A1 ; P1.6 P1.5 640,1565.87 565,1640.87 565,1960 645,2040 v1(850,2040) ; SW1.A1@921.42,431.42 C14.2 ; C20.2 C22.2 1037.5,938.86 1048.64,950 v2(1055,950) ; v1(1375,950) 1375.43,950.43 C18.1 1475.91,950.43 1505.94,980.47 U2.8 ; C23.2 1414.57,1320.91 1340,1395.47 1340,1459.6 1405.4,1525 1570.43,1525 C21.2 1615,1516.06 1508.63,1622.43 1505.06,1622.43 1488.39,1639.09 R16.1 ; C16.1 1824.96,1294.53 1824.96,1263.16 1767.15,1205.34 1767.15,1177.07 U2.47 1766.42,1135.29 1821.7,1080 1893.33,1080 1911.91,1098.58 U2.35 2195.98,1098.58 C17.1 ; U2.23 1943.58,717.32 1985,675.91 C19.1 1975,660 v1(1975,575) ; 2527.4,142.6 2530,140
  Top Layer w20: P5.2 P5.2@116.06,765 ; P7.2 P7.2@116.06,1560 ; C24.2 183.94,290 128.94,345 P4.2 121.06,345 50,416.06 50,698.94 P5.2@116.06,765 ; v1(370,965) 370,968.11 380,978.11 C26.2 228.94,1060 123.94,1165 P6.2 P6.2@116.06,1165 ; C28.2 183.94,1980 123.94,2040 P8.2 P8.2@116.06,2040 ; v1(620,2440) 625,2445 C4.1 851.91,2438.09 851.91,2403.09 VR1.3 1147.28,2107.72 U6.4 1245,1890 ; SW1.A1@921.42,431.42 SW1.A1 916.5,228.5 1005,140 1830,140 ; U.7 C9.1 R5.1 R3.1 1890,2615 v1(1885,2620) ; 1469.57,2098.54 C7.1 R4.1 1333.39,2047.09 1414.57,1965.91 C13.1 1344.57,1890 1245,1890 ; 1470,2095 1599.53,1965.47 1875.47,1965.47 2070.47,2160.47 2076.38,2160.47 2090,2174.09 C11.1 2090,2324.53 C10.2 ; R16.1@1488.39,1639.09 1488.39,1585.1 1476.67,1573.39 1336.61,1573.39 1245,1665 1245,1890 ; *.7 1830,140 ; C16.1 1830.43,1305.91 1890,1365.47 U5.4 1821.72,1500 1810,1511.72 1810,1555 ; U5.3 ccw(c1885,1550) 1885,1555 1810,1555 ; U5.1 1810,1650 1810,1600 ; v1(2120,2625) 2118.7,2626.3 2118.7,2703.7 C1.1 C2.1 ; U1.1 2172.28,1774.84 2180,1767.13 2180,1658.7 2121.3,1600 U5.7 U5.2 1810,1600 ; U1.1@2174.96,1774.84 2457,2056.88 2457,2684.06 2382.68,2758.39 R15.1 2370.87,2758.39 2269.25,2860 C2.1 ; 2527.4,142.6 Q2.3 ; U4.13 2535,1530 2585,1530 ; U4.5 2585,1368.28 2596.72,1380 2635,1380 ; U4.12 2585,1530 ; U4.6 2635,1380 ; U4.11 2635,1530 ; U4.7 2685,1380 ; U4.10 2685,1530 ; U4.9 2735,1530 ; U3.3 3445,655 3500,710 ; BT1.2 P2.1 ; P5.2@116.06,765 66.57,814.5 66.57,1115.5 P6.2@116.06,1165 ; P6.2@116.06,1165 66.57,1214.5 66.57,1510.5 P7.2@116.06,1560 ; P7.2@116.06,1560 66.57,1609.5 66.57,1990.5 P8.2@116.06,2040 ; P8.2@116.06,2040 50,2106.06 50,2425 135,2510 335,2510 335,2730.94 CON1.3 280.7,2757.99 249.93,2788.76 249.93,2829.79 180,2899.72 CON1.2 180,2990.28 264.72,3075 625,3075 845,2855 C5.1 C6.1 1045.91,2755.87 1158.03,2867.99 D1.1 1488.6,2886.59 1488.6,2928.6 1595,3035 2060,3035 2117.4,2977.6 C2.1 ; 1810,1555 1810,1600 ; 1830,140 2530,140 3285,140 3500,355 3500,710 ; 2585,1530 2635,1530 ; 2635,1380 2685,1380 ; 2635,1530 2685,1530 ; 2685,1380 2723.28,1380 2735,1368.28 ; 2685,1530 2735,1530 ; 2735,1368.28 2735,1530 ; 2735,1368.28 U4.8 2735,1244.11 2736.67,1242.43 C15.2 3075.91,1242.43 3183.47,1350 P2.1 ; P2.1 3317.95,1332.05 3437.95,1332.05 3500,1270 3500,710
  Bottom Layer w8: v1(370,965) 371.43,965 386.43,950 v2(1055,950) v1(1375,950)
  Bottom Layer w20: J1.2@335,2510 405,2440 v1(620,2440) ; v1(850,2040) 852.2,2042.2 1038.28,2042.2 1050,2053.92 VR1.3 ; *.7 1975,415 v1(1975,575) ; v1(1885,2620) 2115,2620 v1(2120,2625)
NetBT1_1: BT1.1 U4.14 | length 1867.3
  Top Layer w20: U4.14 2485,1666.62 2486.67,1668.29 2493.53,1668.29 2520,1694.76 2520,2630 2715,2825 BT1.1
NetC3_1: C3.1 D1.2 L1.1 U.8 | length 596.5
  Top Layer w20: C3.1 D1.2 ; U.8 1439.06,2611.81 1478.28,2611.81 1490,2623.53 1490,2722.01 D1.2 ; L1.1 1678.39,2783.19 1637.2,2742.01 D1.2
NetC3_2: C3.2 U.1 | length 133.7
  Top Layer w20: C3.2 1240,2611.81 1241.81,2610 U.1
NetC7_2: C7.2 U.4 | length 419.1
  Top Layer w20: U.4 1269.72,2460 1526.81,2202.91 1526.81,2193.62 C7.2
NetC8_1: C8.1 R5.2 | length 303.4
  Top Layer w20: R5.2 1745.22,2483.01 1745.22,2180.22 C8.1
NetC8_2: C8.2 C9.2 U.6 | length 514.9
  Top Layer w20: U.6 1519.63,2510 1540.47,2489.15 1599.98,2489.15 1605.91,2489.13 1674.57,2420.47 C8.2
NetD2_2: D2.2 R16.2 | length 155
  Top Layer w20: R16.2 D2.2
NetD3_2: D3.2 R17.2 | length 168.5
  Top Layer w20: D3.2 1728.39,1576.85 1745,1560.24 R17.2
NetD4_1: D4.1 Q1.2 Q2.2 | length 371.1
  Top Layer w20: D4.1 2490,557.99 Q2.2 2661.14,443.31 Q1.2
NetD6_2: D6.2 R15.2 | length 156.1
  Top Layer w20: D6.2 R15.2
NetP1_3: P1.3 R7.1 | length 184.5
  Top Layer w8: R7.1 656.61,1706.02 740,1622.64 P1.3
NetP1_4: P1.4 R8.2 | length 217.5
  Top Layer w8: R8.2 661.61,1361.61 726.24,1426.24 726.24,1429.35 740,1443.11 P1.4
NetQ2_1: Q2.1 R9.2 | length 245.2
  Top Layer w20: R9.2 2305.04,356.65 Q2.1 Q2.1 2355,356.69
NetR1_1: R1.1 R3.2 U.5 | length 1067.5
  Top Layer w20: U.5 1439.06,2458.19 1476.81,2458.19 1600,2335 1600,2140 1635,2105 1845,2105 1875.14,2135.14 1875.14,2178.53 R1.1 1876.61,2472.56 1887.28,2483.23 R3.2
NetR2_1: R2.1 R4.2 U.3 | length 586.8
  Top Layer w20: R2.1 1112.05,2442.05 1170,2500 ; U.3 1180,2510 1170,2500 ; R4.2 1256.61,2185.91 1170,2272.52 1170,2500
NetR14_1: R14.1 VR1.1 | length 300.6
  Top Layer w20: R14.1 788.23,2143.23 VR1.1
OSCIN: C20.1 U2.5 Y2.2 | length 852.9
  Top Layer w8: C20.1 Y2.2 1210,1173.11 1245.37,1137.74 1334.22,1137.74 1358.57,1113.39 1470,1113.39 1475.91,1113.39 1549.76,1039.53 U2.5
OSCOUT: C22.1 U2.6 Y2.1 | length 862.3
  Top Layer w8: C22.1 Y2.1 1210,936.89 1245.37,972.26 1314.22,972.26 1378.57,1036.61 1470,1036.61 1506.61,1000 1640.54,1000 1658.61,1018.06 1661.55,1018.06 1662.6,1019.11 1687.93,1019.11 U2.6
PA0: *.1 U2.10 | length 883.1
  Top Layer w8: *.1 1230,520 1650.37,940.37 1687.93,940.37 U2.10
PA1: *.2 U2.11 | length 816.5
  Top Layer w8: *.2 1330,591.03 1659.66,920.69 1687.93,920.69 U2.11
PA2: *.3 U2.12 | length 752.1
  Top Layer w8: *.3 1430,665.71 1666.02,901.73 U2.12
PA3: *.4 U2.13 | length 663.4
  Top Layer w8: *.4 1530,626.93 U2.13
PA4: U2.14 U6.1 U6.2 | length 1364.2
  Top Layer w8: U6.2 1152.78,1790 1160,1782.78 v1(1160,1430) ; v1(1670,1190) 1766.42,1093.58 U2.14
  Bottom Layer w8: v1(1160,1430) 1400,1190 v1(1670,1190)
PA5: *.5 U2.15 | length 638.3
  Top Layer w8: *.5 1630,420 1786.1,576.1 U2.15
PA6: U2.16 U6.3 VR1.2 | length 1965.9
  Top Layer w8: U2.16 1806.52,844.39 1806.52,1056.52 v2(1806.67,1056.67)
  Top Layer w20: VR1.2 1040,2115 1040,1880 ; v2(1040,1645) 1040,1880 ; U6.3 1080,1840 1040,1880
  Bottom Layer w8: v2(1040,1645) 1254.24,1645 1741.84,1157.41 1741.84,1121.51 v2(1806.67,1056.67)
PA7: *.6 U2.17 | length 613.2
  Top Layer w8: *.6 1825.47,365.47 U2.17
PA8: C28.1 P8.1 R20.2 U2.29 | length 3108.3
  Top Layer w8: P8.1 376.77,2140 R20.2 380,2056.77 450.87,1985.91 C28.1 ; v1(1955,1040) 1959.5,1035.5 1959.5,1000.5 1978.8,981.2 2020.61,981.2 U2.29
  Bottom Layer w8: P8.1 165,2140 500,1805 500,1390 861.07,1028.93 1866.29,1028.93 1877.36,1040 v1(1955,1040)
PA9: U2.30 U3.5 | length 1360.4
  Top Layer w8: U2.30 2022.07,999.43 2085.57,999.43 2275,810 2795,810 U3.5@3154.19,450.81
PA10: U2.31 U3.4 | length 1340
  Top Layer w8: U2.31 2110.16,1019.84 2245,885 2825,885 U3.4@3164.75,545.25
PA11: U2.32
PA12: U2.33
PA15: U2.38
PB0: R9.1 U2.18 | length 806.2
  Top Layer w8: U2.18 1845.16,549.53 1971.3,423.39 R9.1@2305,423.39
PB1: U2.19
PB3: U2.39
PB4: U2.40
PB5: U2.41 U4.3 | length 710.9
  Top Layer w8: U2.41 1885.26,1177.07 1885.26,1205.34 1901.17,1221.25 2130.47,1221.25 2154.39,1245.17 2290.17,1245.17 2362.39,1317.39 2461.19,1317.39 2485,1293.58 U4.3
PB6: R13.2 U2.42 U4.16 U5.6 | length 939.3
  Top Layer w8: U2.42 1865.57,1177.07 1865.57,1208.28 1894.54,1237.25 2017.25,1237.25 2039.27,1259.27 2039.27,1308.57 2134.09,1403.39 R13.2 2145.91,1403.39 2162.57,1420.06 2162.57,1425.96 2235,1498.39 v1(2235,1550) ; U5.6 v1(2235,1550) ; U4.16 2385,1616.42 2318.58,1550 v1(2235,1550)
PB7: R12.2 U2.43 U4.15 U5.5 | length 1130.7
  Top Layer w8: U2.43 1845.16,1239.73 1890,1284.57 1890,1305.83 1947.43,1363.25 1947.43,1381.72 1964.09,1398.39 R12.2 1978.31,1406.7 v1(1978.31,1500) ; 2074.53,1497.01 2101.58,1497.01 U5.5 v1(1978.31,1500) ; U4.15 2435,1667.6 2411.19,1691.41 2246.38,1691.41 2131.16,1576.19 2021.19,1576.19 1978.31,1533.31 v1(1978.31,1500)
PB8: U2.45
PB9: U2.46
PB10: U2.21
PB11: U2.22
PB12: C24.1 P4.1 R10.2 U2.25 | length 2560.6
  Top Layer w8: P4.1 371.61,445 385.5,431.11 413.89,431.11 440.87,404.13 C24.1 ; v1(2021.34,853.66) U2.25
  Bottom Layer w8: P4.1 128.94,445 423.94,740 1907.68,740 v1(2021.34,853.66)
PB13: C25.1 P5.1 R11.2 U2.26 | length 2445.1
  Top Layer w8: P5.1 123.94,865 167.32,821.61 R11.2 385.91,821.61 402.57,804.94 402.57,799.04 440.87,760.75 C25.1 ; v1(1940,905) 1956.42,921.42 U2.26
  Bottom Layer w8: P5.1 195,790 1825,790 v1(1940,905)
PB14: C26.1 P6.1 R18.2 U2.27 | length 2519.6
  Top Layer w8: P6.1 126.72,1258.28 363.33,1258.28 R18.2 385.91,1241.61 450.87,1176.65 C26.1 ; v1(1900,965) 1923.9,941.1 U2.27
  Bottom Layer w8: P6.1 355,1265 625,995 1870,995 v1(1900,965)
PB15: C27.1 P7.1 R19.2 U2.28 | length 2658.1
  Top Layer w8: P7.1 373.39,1660 R19.2 385.91,1666.61 450.87,1601.65 C27.1 ; v1(1915,1007.93) 1917.07,1007.93 1964.21,960.79 U2.28
  Bottom Layer w8: P7.1 122.75,1657.25 162.75,1657.25 809,1011 1876.63,1011 1877.63,1010 1912.93,1010 v1(1915,1007.93)
PC13: R17.1 U2.2 | length 413.6
  Top Layer w8: U2.2 1688.57,1098.67 1635.69,1098.67 1631,1103.36 1631,1298.52 1739.09,1406.61 R17.1
PC14: 3.2 C21.1 U2.3 | length 556.8
  Top Layer w8: 3.2 1573.66,1445 C21.1@1609.09,1409.57 ; U2.3 1632.83,1078.9 1580,1131.73 1580,1374.57 1589.47,1384.04 1589.47,1389.94 C21.1@1609.09,1409.57 ; C21.1@1609.09,1409.57 C21.1 C21.1@1609.09,1409.57
PC15: 3.1 C23.1 U2.4 | length 572.3
  Top Layer w8: 3.1 1400.79,1429.25 1444.99,1385.05 1456.91,1385.05 1485.43,1356.53 C23.1 1485.43,1309.09 1535,1259.53 1535,1110 1585.75,1059.25 1688.62,1059.25 U2.4
RESET: C14.1 R6.2 SW1.B1 SW1.B2 U2.7 | length 1656
  Top Layer w8: SW1.B2 SW1.B1 R6.2 ; v1(1044.75,694.75) 1044.75,615.45 R6.2 ; C14.1 1125.43,528.86 1051.61,602.68 R6.2 ; v1(1540,705) 1735,900 1735,982.09 1717.67,999.43 1689.39,999.43 U2.7
  Bottom Layer w8: v1(1044.75,694.75) 1055,705 v1(1540,705)
SWCLK: P2.2 U2.37 | length 1495.7
  Top Layer w8: U2.37 2108.18,1176.34 2151.84,1220 2315,1220 2470,1065 3100,1065 3285,1250 P2.2
SWDIO: P2.3 U2.34 | length 1443.9
  Top Layer w8: U2.34 2098.42,1078.9 2262.32,915 3061.06,915 3296.06,1150 P2.3
VBAT: U2.1
VCC: C4.2 C5.2 C6.2 CON1.1 J1.1 R2.2 R14.2 U.2 | length 2380.7
  Top Layer w20: J1.1@135,2410 335,2410 446.54,2410 552.4,2515.87 575,2515.87 ; CON1.1 416.22,2920.49 448.64,2888.07 625.79,2888.07 828.86,2685 C5.2 ; R14.2 575,2515.87 ; C6.2 C5.2 ; U.2 1087.09,2560 1045.91,2518.82 R2.2 1038.52,2517.34 846.48,2517.34 C4.2 ; 575,2515.87 C4.2 ; C4.2 C5.2
VCC3V3: *.8 C12.1 C13.2 C15.1 C16.2 C17.2 C18.2 C19.2 D2.1 D3.1 D4.2 P1.1 P1.2 P2.4 Q1.1 R6.1 R10.1 R11.1 R12.1 R13.1 R18.1 R19.1 R20.1 U1.2 U1.4 U2.9 U2.24 U2.36 U2.48 U4.2 U5.8 | length 14811.6
  Top Layer w8: C18.2 1539.65,879.57 1620.87,960.79 U2.9 ; v1(1700,1310) 1759.57,1310 C16.2 1746.73,1300 U2.48 ; U2.24 1963.27,821.02 2055.87,728.43 C19.2 2070.87,655 v1(2180,655) ; U2.36 2043.88,1140.81 2185.38,1140.81 C17.2
  Top Layer w20: R10.1 385.91,513.39 507.95,635.43 507.95,835 ; R11.1 385.91,898.39 507.95,1020.43 ; R18.1 385.91,1318.39 507.95,1440.43 ; R19.1 385.91,1743.39 v1@505.75,1863.23 ; R20.1 385.91,2220 507.95,2097.95 v1(507.95,1877.05) 507.95,1440.43 ; P1.2 P1.1 ; v1(1379.34,1877.05) 1486.91,1877.05 ; C18.2 1464.09,879.57 1193.11,608.58 R6.1 1122.06,614.91 1122.06,707.94 1060,770 572.95,770 507.95,835 ; C13.2 1485.43,1954.09 C13.2@1486.91,1952.62 ; C12.1 C12.1@1680,1775.51 ; v1(1970,1265) R12.1 ; U5.8 2104.57,1645 1990,1645 1935,1700 1690,1700 1665.24,1675.24 1665.24,1658.62 D3.1 1651.61,1646.97 1637.99,1660.59 1625.83,1660.59 1488.39,1798.03 D2.1 1486.91,1801.48 1486.91,1877.05 ; R13.1 2255.27,1326.61 2271.89,1310 v1(2275,1310) ; U1.2 U1.4 1769.49,1865 C12.1@1680,1775.51 ; v1(2180,655) 2251.26,655 ; C17.2 2205,1165 v1(2275,1165) ; D4.2 2346.26,560 2251.26,655 ; U4.2 2435,1242.4 2532.4,1145 2950,1145 v1(2975,1170) 2975.78,1170.78 3069.22,1170.78 C15.1 3136.21,1171.57 3264.14,1299.5 3324.44,1299.5 3353.43,1270.5 3353.43,1099.5 3303.94,1050 P2.4 ; Q1.1 2622.68,655 2251.26,655 ; 507.95,835 507.95,1020.43 ; 507.95,1020.43 507.95,1440.43 ; 1486.91,1877.05 C13.2@1486.91,1952.62 ; C13.2@1486.91,1952.62 1628.74,1810.79 1644.72,1810.79 C12.1@1680,1775.51
  Bottom Layer w20: v1(507.95,1877.05) 700,1877.05 ; P1.1 840,1565.87 700,1705.87 700,1877.05 ; v1(1700,1310) 1745,1265 v1(1970,1265) 2275,1265 ; *.8 2180,520 v1(2180,655) 2275,750 v1(2275,1165) ; v1(2275,1310) 2275,1265 ; v1@2961.87,1165 v1(2275,1165) ; v1(2975,1170) 2975,1510 2607.95,1877.05 700,1877.05 ; v1(2275,1165) 2275,1265
pads on no net: U3.1 U3.6 U4.1 U4.4 U6.5 U6.6 U6.7

## Polygon pours and split planes (outlines as drawn)
GND on Top Layer "GND_L01_P010" (solid, remove dead copper, pour order 10): 0,-5 0,3170 3740,3170 3740,-5
VCC3V3 on Top Layer "NONET_L-01_P-001" (solid, remove dead copper, pour order 8): 2190,1910 1940,1910 1940,1825 2190,1825
5V on Top Layer "NONET_L-01_P-001" (solid, remove dead copper, pour order 7): 1805,2935 2060,2935 2065,2940 2070,2935 2070,2675 1805,2675 1800,2680
NetC3_1 on Top Layer "NONET_L-01_P-001" (solid, remove dead copper, pour order 6): 1290,2770 1295,2775 1690,2775 1690,2660 1680,2660 1290,2660
NetC3_1 on Top Layer "NONET_L-01_P-001" (solid, remove dead copper, pour order 5): 1405,2605 1405,2765 1408.75,2768.75 1405,2780 1540,2780 1540,2600
VCC on Top Layer "NONET_L-01_P-001" (solid, remove dead copper, pour order 4): 815,2705 820,2710 1070,2710 1070,2495 810,2495
VCC on Top Layer "NONET_L-01_P-001" (solid, remove dead copper, pour order 3): 110,2435 360,2435 365,2440 380,2425 380,2320 110,2320 105,2325
VCC on Top Layer "NONET_L-01_P-001" (solid, remove dead copper, pour order 2): 610,2195 610,2240 585,2505 485,2505 480,2510 475,2505 420,2505 320,2405 455,2205 495,2195
VCC on Top Layer "NONET_L-01_P-001" (solid, remove dead copper, pour order 0): 415.44,2944.56 596.13,2944.56 869.68,2633.8 860,2495 445,2495
GND on Bottom Layer "GND_L02_P012" (solid, remove dead copper, pour order 12): 0,-5 0,3170 3740,3170 3740,-5

## Keep-outs
Keep-Out Layer:
  lines w10: 585,3170 617.86,3170 3740,3170 3740,-5 0,-5 0,3170 92.86,3170 495.55,3170 570,3170 590,3170

## Silkscreen, mask and mechanical layers (free items; w line width, h text height)
Top Overlay:
  text "STOP ALARM" at 314.4,1965 h50 r90
  text "MENU MODE" at 314.4,1475 h50 r90
  text "GND" at 3385,1364.32 h50 r180
  text "SWCLK" at 3370,1265 h50 r180
  text "SWDIO" at 3375,1165 h50 r180
  text "DOWN" at 304.4,1130 h50 r90
  text "3V3" at 3400,1064.19 h50 r180
  text "UP" at 304.4,785 h50 r90
  text "5V" at 3275,779.32 h50 r180
  text "GND" at 3260,680 h50 r180
  text "TX" at 3265,580 h50 r180
  text "RX" at 3265,485 h50 r180
  text "DC" at 1444.45,470 h50 r90
  text "3V3" at 1954.4,465 h50 r90
  text "RST" at 1344.4,460 h50 r90
  text "GND" at 1849.4,445 h50 r90
  text "BUSY" at 1244.4,425 h50 r90
  text "SPI_CS" at 1546.18,380 h50 r90
  text "SPI_SCK" at 1641.18,350 h50 r90
  text "SPI_MOSI" at 1741.18,335 h50 r90
  text "ENTER" at 315,305 h50 r90

## Text inside footprints (layer, text, board x,y; h text height)
BT1: Top 3D Body "ZONE FOR ADHESIVE FIXATION" at 3496.41,1972.64 h39.37 r90